# Altium PCB Power_Ctrl_Board_PCB.PcbDoc (part 2 of 2)
Units mil, origin at the board's own origin, x right, y up, seen from the top; angles counter-clockwise.
Board outline 6299.21 x 3937.01 mil, 4 copper layers (Top Layer, GND, +12, Bottom Layer), stack 23.756 mil thick; 118 components, 80 nets, 423 pads, 36 vias.
Unrouted connection lines stored in the file: 206.
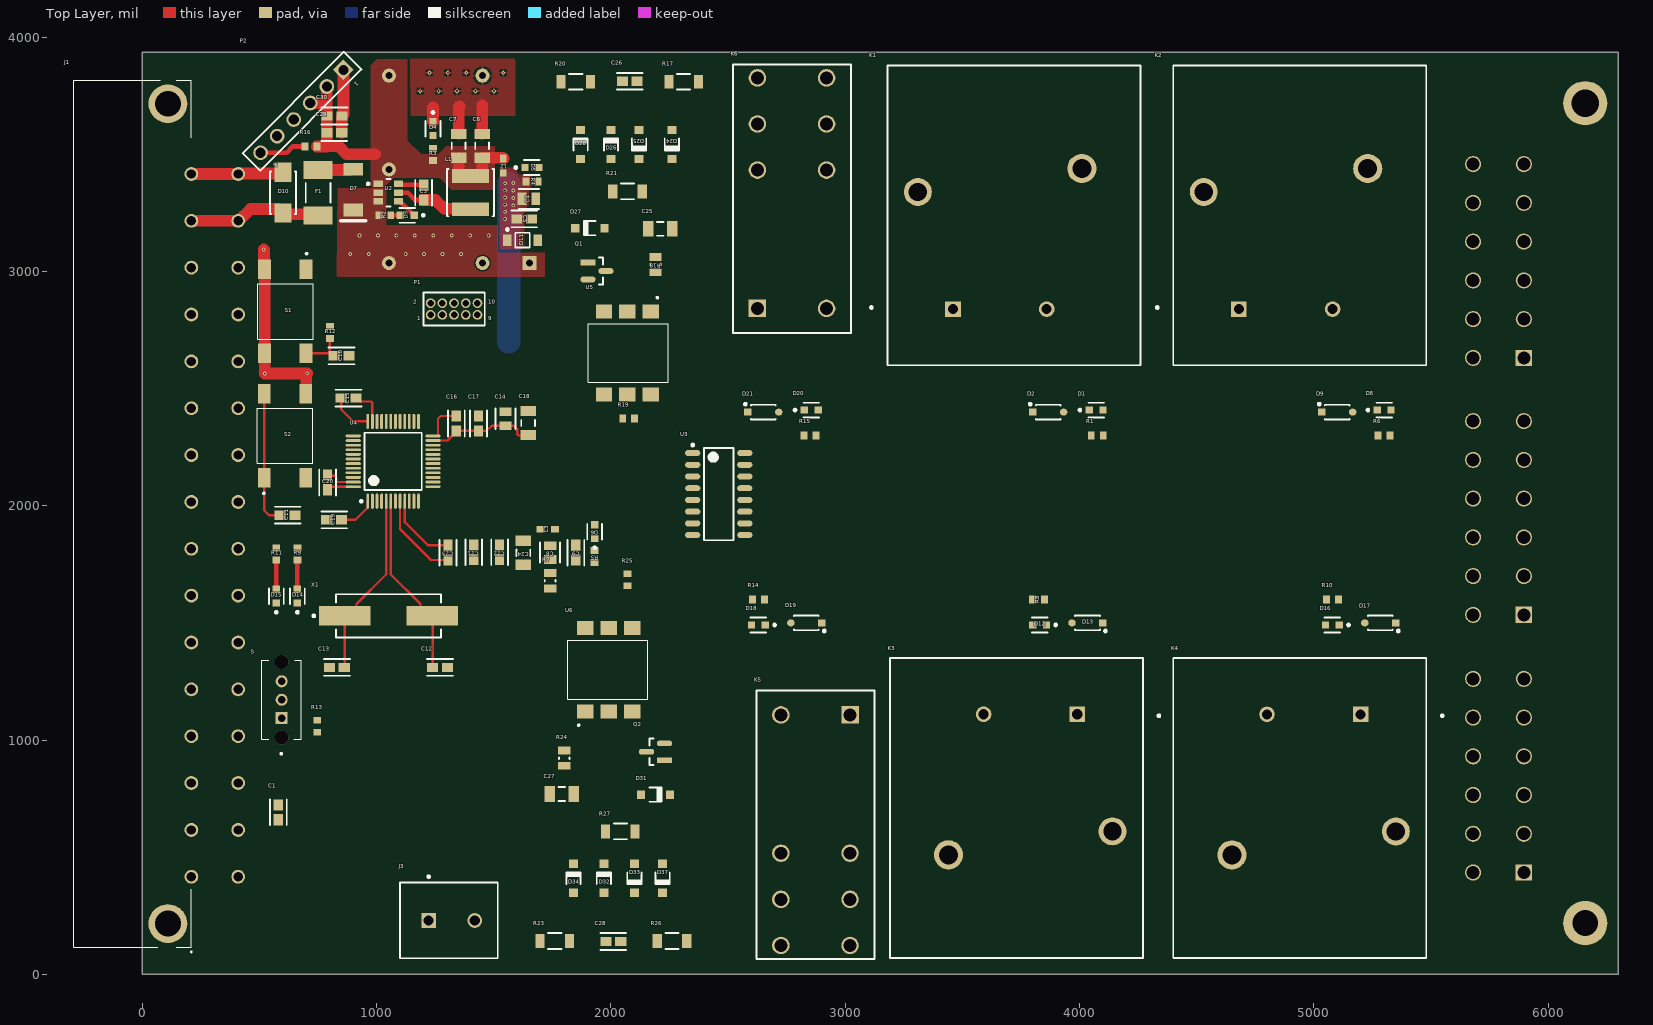
[diagram p0: Top Layer view]

## Polygon pours and split planes (outlines as drawn) (continued)
+12 on Top Layer "+12_L01_P000" (solid, remove dead copper, pour order 0): 1040,3355 834,3355 828.46,2978 1717,2978 1717,3080.34 1516.22,3080.34 1516.22,3198.4 1040,3198.4
GND on GND (split plane): 6279.12,20.1 20.1,20.1 20.1,3916.91 6279.12,3916.91
+12 on +12 (split plane): 6279.12,20.1 20.1,20.1 20.1,3916.91 6279.12,3916.91

## Text inside footprints (layer, text, board x,y; h text height)
P1: Top Overlay "2" at 1156.57,2855.75 h30; Top Overlay "1" at 1172.32,2784.88 h30; Top Overlay "10" at 1475.87,2855.75 h30; Top Overlay "9" at 1475.87,2784.88 h30
P2: Top Overlay "1" at 908.44,3816.79 h30 r225; Top Overlay "6" at 562.13,3470.48 h30 r225